# Altium PCB UP02513040.PcbDoc
Units mil, origin at the board's own origin, x right, y up, seen from the top; angles counter-clockwise.
Board outline 5400 x 2950 mil, 2 copper layers (Top Layer, Bottom Layer); 37 components, 18 nets, 84 pads, 0 vias.
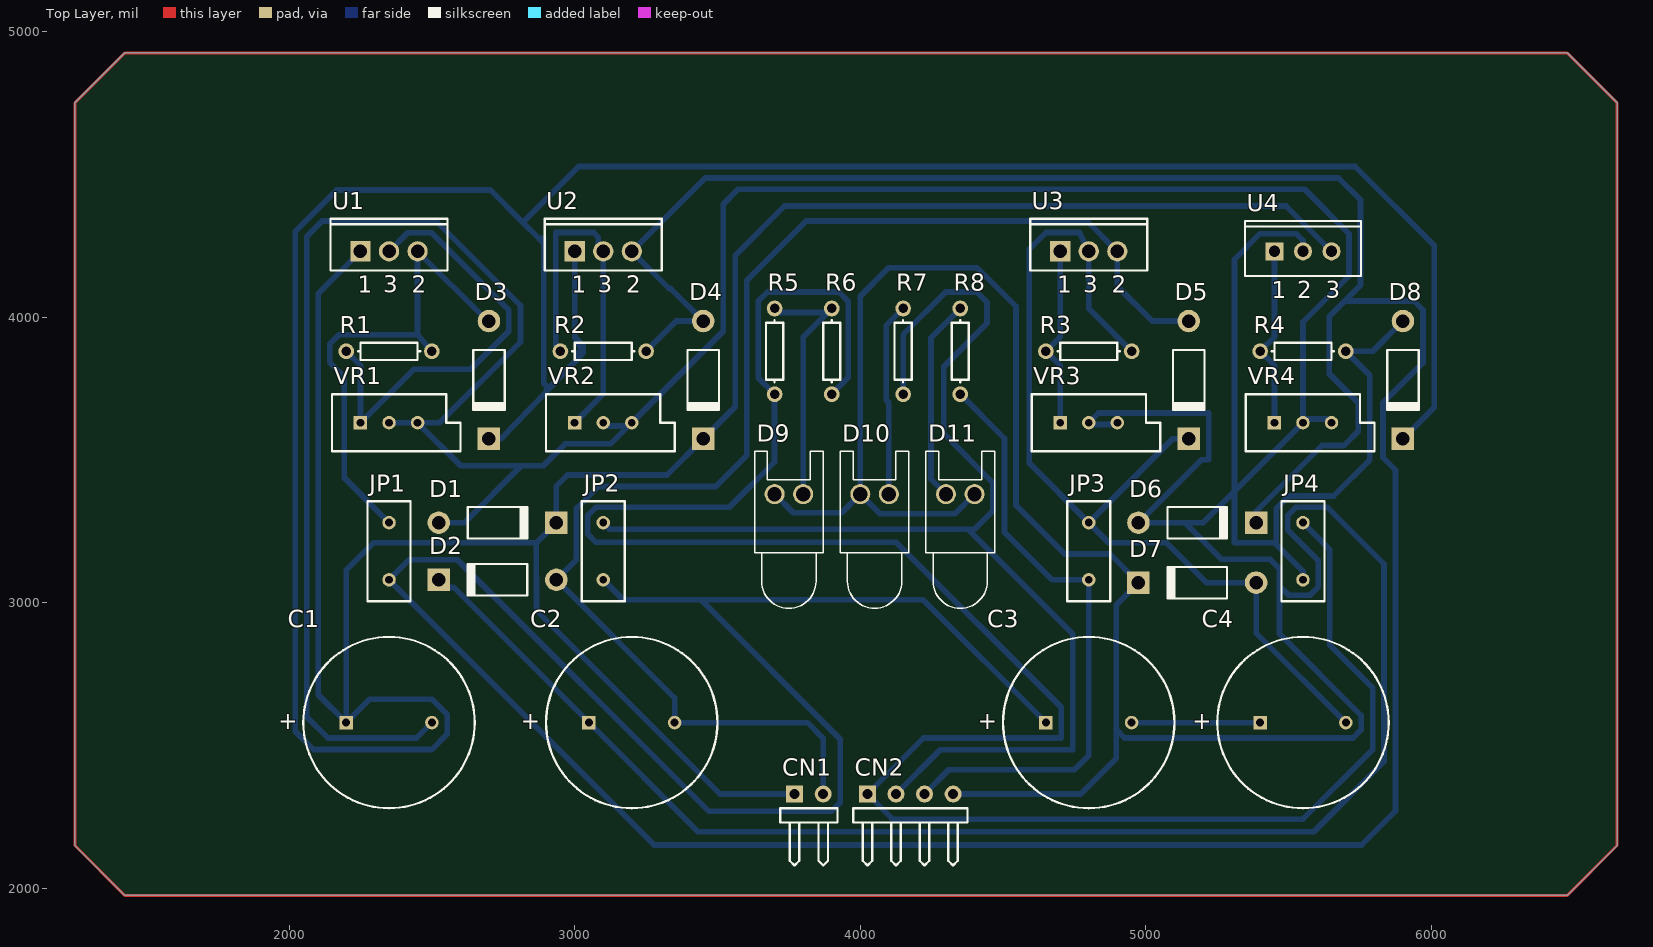
[diagram p0: Top Layer view]
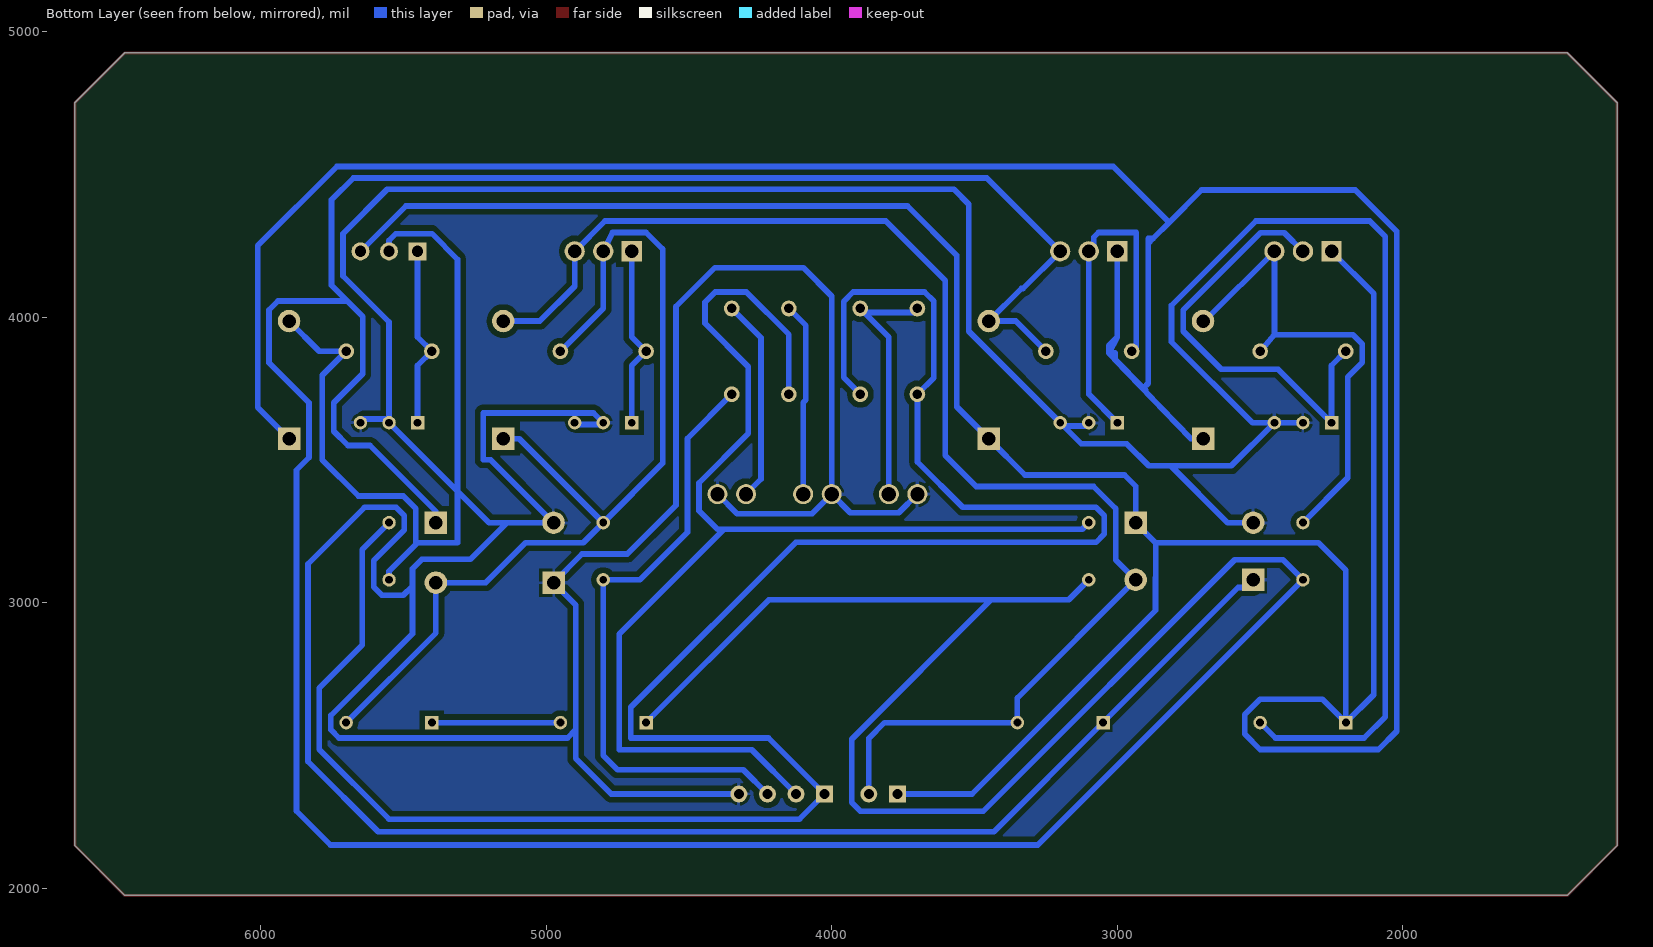
[diagram p1: Bottom Layer view, seen from below]

## Layer stack, top to bottom
Top Solder: solder mask 0.4, Solder Resist, Dk 3.5
Top Layer: signal copper 1.4
Dielectric 1: dielectric 12.6, FR-4, Dk 4.8
Bottom Layer: signal copper 1.4
Bottom Solder: solder mask 0.4, Solder Resist, Dk 3.5

## Board outline
1250,2150 1250,4750 1425,4925 6475,4925 6650,4750 6650,2150 6475,1975 1425,1975

## Design rules (kind name [scope] priority, off if disabled: settings)
Clearance [All] p1: gap=20 ignorepadtopadclearanceinfootprint=FALSE
PolygonConnect [All] p1: connectstyle=Relief reliefconductorwidth=10 reliefentries=4 polygonreliefangle="90 Angle" airgapwidth=10
RoutingLayers [All] p1: top layer_v5=FALSE bottom layer_v5=TRUE
RoutingVias [All] p1: holewidth=28 width=50 viastyle="Through Hole" minholewidth=28 minwidth=50 maxholewidth=28 maxwidth=50
SolderMaskExpansion [All] p1: expansion=4
Width [All] p1: maxlimit=40 minlimit=10 preferedwidth=20
29 further rules are at their usual default settings.

## Components (designator, comment, footprint, x,y, rotation, side; value= is the part's Value field where it differs from the comment)
C1 "Cap Pol1" RB7.6-15 2350,2580 r180 top value=0.1uF/10V
C2 "Cap Pol1" RB7.6-15 3200,2580 r180 top value=0.1uF/10V
C3 "Cap Pol1" RB7.6-15 4800,2580 r180 top value=1uF/10V
C4 "Cap Pol1" RB7.6-15 5550,2580 r180 top value=1uF/10V
CN1 "Header 2H" HDR1X2H 3770,2330 r0 top
CN2 "Header 4H" HDR1X4H 4025,2330 r0 top
D1 "1N4001" DO-41 2730,3280 r0 top
D2 "1N4001" DO-41 2730,3080 r180 top
D3 "1N4001" DO-41 2700,3780 r270 top
D4 "1N4001" DO-41 3450,3780 r270 top
D5 "1N4001" DO-41 5150,3780 r270 top
D6 "1N4001" DO-41 5180,3280 r0 top
D7 "1N4001" DO-41 5180,3070 r180 top
D8 "1N4001" DO-41 5900,3780 r270 top
D9 "+12V" LED-0 3750,3380 r0 top
D10 "+5V" LED-0 4050,3380 r0 top
D11 "-5V" LED-0 4350,3380 r0 top
JP1 "Jumper" RAD-0.2 2350,3180 r270 top
JP2 "Jumper" RAD-0.2 3100,3180 r90 top
JP3 "Jumper" RAD-0.2 4800,3180 r270 top
JP4 "Jumper" RAD-0.2 5550,3180 r90 top
R1 "Res1" AXIAL-0.3 2350,3880 r180 top value=240
R2 "Res1" AXIAL-0.3 3100,3880 r180 top value=240
R3 "Res1" AXIAL-0.3 4800,3880 r180 top value=240
R4 "Res1" AXIAL-0.3 5550,3880 r180 top value=240
R5 "Res1" AXIAL-0.3 3700,3880 r90 top value=1K
R6 "Res1" AXIAL-0.3 3900,3880 r90 top value=1K
R7 "Res1" AXIAL-0.3 4150,3880 r90 top value=150
R8 "Res1" AXIAL-0.3 4350,3880 r90 top value=150
U1 "L7805CP" ISOWATT220AB 2350,4230 r0 top
U2 "L7805CP" ISOWATT220AB 3100,4230 r0 top
U3 "L7905CP" ISOWATT220AB 4800,4230 r0 top
U4 "LM317T" 221A-04 5550,4230 r0 top
VR1 "RPot" VR5 2350,3630 r0 top value=1K
VR2 "RPot" VR5 3100,3630 r0 top value=1K
VR3 "RPot" VR5 4800,3630 r0 top value=1K
VR4 "RPot" VR5 5550,3630 r0 top value=1K

## Footprints (in the part's own frame and the unit in brackets; to place one, negate y for a bottom-side part, rotate by r counter-clockwise, add the part's x,y. Pads: shape width x height; smd on the part's side, far side on the other; paste and mask are expansions set on the pad)
221A-04 [mm] "TO, Thru-Hole, Vertical, Heatsink Mounted; 3 In-Line Leads; Pitch 2.54 mm"
  rect 1.6x1.6 hole 1: 1(-2.54,0)
  round 1.6 hole 1: 2(0,0) 3(2.54,0)
  silkscreen extent -5.15,-2.2 5.15,2.7
AXIAL-0.3 [mm] "Axial Device, Thru-Hole; 2 Leads; 0.3 in Pin Spacing"
  round 1.4 hole 0.85: 1(-3.81,0) 2(3.81,0)
  silkscreen extent -2.77,-0.76 2.77,0.76
DO-41 [mm] "Diode, Axial; Body 5.2 x 2.7 mm (LxDia. max), Lead Dia. 0.86 mm (max)"
  round 2 hole 1.2: 1(-5.23,0)
  rect 2x2 hole 1.2: 2(5.23,0)
  silkscreen extent -2.65,-1.4 2.75,1.4
HDR1X2H [mm] "Connector; Header; 2 Position; Right Angle"
  rect 1.5x1.5 hole 0.9: 1(0,0)
  round 1.5 hole 0.9: 2(2.54,0)
  silkscreen extent -1.27,-6.35 3.81,-1.27
HDR1X4H [mm] "Connector; Header; 4 Position; Right Angle"
  rect 1.5x1.5 hole 0.9: 1(0,0)
  round 1.5 hole 0.9: 2(2.54,0) 3(5.08,0) 4(7.62,0)
  silkscreen extent -1.27,-6.35 8.89,-1.27
ISOWATT220AB [mm] "TO, Thru-Hole, Vertical, Heatsink Mounted; 3 In-Line Leads; Pitch 2.54 mm; Pin sequence 1, 3, 2"
  rect 1.8x1.8 hole 1.2: 1(-2.54,0)
  round 1.8 hole 1.2: 2(2.54,0) 3(0,0)
  silkscreen extent -5.2,-1.7 5.2,2.9
LED-0 [mil] "LED; 2 Leads"
  round 70 hole 50: 1(50,0) 2(-50,0)
  silkscreen extent -120,-400 120,150
RAD-0.2 [mm] "Radial Cap, Thru-Hole; 2 Leads; 0.2 in Pin Spacing"
  round 1.2 hole 0.7: 1(-2.54,0) 2(2.54,0)
  silkscreen extent -4.44,-1.91 4.44,1.91
RB7.6-15 [mm] "Polarized Capacitor (Radial); 2 Leads"
  rect 1.2x1.2 hole 0.7: 1(3.81,0)
  round 1.2 hole 0.7: 2(-3.81,0)
  silkscreen extent -7.62,-7.62 7.62,7.62
VR5 [mm] "Thru-Hole; 3 Leads"
  rect 1.2x1.2 hole 0.7: 1(-2.54,0)
  round 1.2 hole 0.7: 2(0,0) 3(2.54,0)
  silkscreen extent -5.08,-2.54 6.35,2.54

## Part data
C1 C2 C3 C4: "Polarized Capacitor (Radial)", LatestRevisionDate=17-Jul-2002, LatestRevisionNote="Re-released for DXP Platform.", PackageDescription="Polarized Capacitor (Radial); 2 Leads", PackageReference=RB7.6-15, Published=8-Jun-2000, Publisher="Altium Limited"
CN1: "Header, 2-Pin, Right Angle", Manufacturer="PHOENIX CONTACT", Manufacturer Part Number=1725656, Rated Current=6, Rated Voltage=125, Supplier Part Number 1=2785623, Voltage Rating VAC=63, Block Orientation="Through Hole Right Angle", ComponentLink1Description=http://eshop.phoenixcontact.com/phoenix/treeViewClick.do?UID=1725656&parentUID=null&reloadFrame=true, ComponentLink1URL=http://eshop.phoenixcontact.com/phoenix/treeViewClick.do?UID=1725656&parentUID=null&reloadFrame=true, ComponentLink2Description=http://www.farnell.com/datasheets/2309717.pdf, ComponentLink2URL=http://www.farnell.com/datasheets/2309717.pdf, ComponentLink3Description=http://www.farnell.com/product360s/PHOENIXCONTACT-2WAY.php, ComponentLink3URL=http://www.farnell.com/product360s/PHOENIXCONTACT-2WAY.php, ComponentLink4Description=http://www.farnell.com/product360s/product360.php?productshortname=PHOENIXCONTACT-2WAY, ComponentLink4URL=http://www.farnell.com/product360s/product360.php?productshortname=PHOENIXCONTACT-2WAY, ComponentLink5Description=http://www.farnell.com/datasheets/1378966.pdf, ComponentLink5URL=http://www.farnell.com/datasheets/1378966.pdf, ComponentLink6Description=http://www.farnell.com/datasheets/2369305.pdf, ComponentLink6URL=http://www.farnell.com/datasheets/2369305.pdf, Conductor Area CSA=0.5, Connector Mounting="PCB Mount", Connector Type="Terminal Block, PCB", LatestRevisionDate=17-Jul-2002, LatestRevisionNote="Re-released for DXP Platform.", No. of Positions=2, Pitch Spacing=2.54, Pricing 1="1=7.29 (GBP)", Product Range=MPT, Publisher="Altium Limited", RoHS=YES, Stock 1=15, Supplier 1=Farnell, SVHC="No SVHC (15-Jun-2015)", Wire Area Size Max=0.5, Wire Area Size Min="0.14mm²<!--FANDB--><div class=\"features-and-benefits-container\"><div class=\"features-and-benefits-description\"><span class=\"features-benefits-value\">The 1725656 is a 2-way Wire-to-board PCB Terminal Block made of PA insulation that allows connection of two conductors. The MPT 0,5/ 2-2,54 has extremely small design for the respective conductor cross section. It features screw connection with tension sleeve and wave soldering.</span></div><div class=\"features-and-benefits-list\"><ul class=\"features-and-benefits-list-list\"><li class=\"features-and-benefits-list-item\">Green color</li><li class=\"features-and-benefits-list-item\">Well-known connection principle allows worldwide use</li><li class=\"features-and-benefits-list-item\">UL94V-0 Flammability rating</li><li class=\"features-and-benefits-list-item\">Low temperature rise, maximum contact force</li></ul></div><div class=\"features-and-benefits-applications\"><ul class=\"features-and-benefits-value\"><li class=\"features-and-benefits-list-item\">Industrial</li></ul></div></div>", Wire Connection Method=Screw, Wire Size AWG Max=20, Wire Size AWG Min=26
CN2: "Header, 4-Pin, Right Angle", Supplier Part Number 1=2785762, LatestRevisionDate=17-Jul-2002, LatestRevisionNote="Re-released for DXP Platform.", Publisher="Altium Limited", Supplier 1=Farnell
D1 D2 D3 D4 D5 D6 D7 D8: library part "Diode 1N4001", "1 Amp General Purpose Rectifier", Capacitance @ Vr, F=-, Current - Average Rectified (Io)=1A, Current - Reverse Leakage @ Vr="5µA @ 50V", Manufacturer="Micro Commercial Co", Manufacturer Part Number=1N4001-TP, Operating Temperature - Junction="-55°C ~ 150°C", Package / Case="DO-204AL, DO-41, Axial", Supplier Device Package=DO-41, Supplier Part Number 1=1N4001-TPMSTR-ND, Voltage - Forward (Vf) (Max) @ If="1.1V @ 1A", Category="Discrete Semiconductor Products", Code_JEDEC=DO-204-AL, ComponentLink1Description="Manufacturer Link", ComponentLink1URL=http://www.fairchildsemi.com/, ComponentLink2Description=Datasheet, ComponentLink2URL=http://www.fairchildsemi.com/ds/1N%2F1N4001.pdf, ComponentLink3Description=http://www.mccsemi.com/up_pdf/1N4001-1N4007(DO-41).pdf, ComponentLink3URL=http://www.mccsemi.com/up_pdf/1N4001-1N4007(DO-41).pdf, DatasheetVersion=1998, Diode Type=Standard, LatestRevisionDate=17-Jul-2002, LatestRevisionNote="Re-released for DXP Platform.", Mounting Type="Through Hole", PackageDescription="Diode, Axial; Body 5.2 x 2.7 mm (LxDia. max), Lead Dia. 0.86 mm (max)", PackageReference=DO-41, PackageVersion=Aug-1999, Packaging="Tape & Reel (TR)", Part Status=Active, Pricing 1="5000=0.01415, 10000=0.0123, 25000=0.01107, 50000=0.00984, 125000=0.0082 (EUR)", Published=8-Jun-2000, Publisher="Altium Limited", RoHS="RoHS Compliant", Speed="Standard Recovery >500ns, > 200mA (Io)", Stock 1=80000, Supplier 1=Digi-Key
D9 D10 D11: library part LED0, "Typical INFRARED GaAs LED", Manufacturer=MULTICOMP, Manufacturer Part Number=OVL-3324, Supplier Part Number 1=15R2196, ComponentLink1Description=http://www.farnell.com/datasheets/1661953.pdf, ComponentLink1URL=http://www.farnell.com/datasheets/1661953.pdf, LatestRevisionDate=08-Jul-2005, LatestRevisionNote="Mech Layer 1 removed.", PackageDescription="LED; 2 Leads", PackageReference=LED-0, Pricing 1="1=0.576, 10=0.432, 100=0.287, 200=0.222, 500=0.18, 1000=0.14, 2000=0.13, 5000=0.123 (USD)", Published=8-Jun-2000, Publisher="Altium Limited", RoHS=YES, Stock 1=1580, Supplier 1=Newark
JP1 JP2 JP3 JP4: "Jumper Wire", Colour=Black, Contact Resistance=20, Current Rating=3, Flammability Rating=UL94V-0, Insulation Resistance=1000, Manufacturer=MULTICOMP, Manufacturer Part Number=2211S-02G, Operating Temperature Max=105, Operating Temperature Min=-40, Supplier Part Number 1=1593411, Voltage Rating VAC=250, Withstand Voltage="600V<!--FANDB--><div class=\"features-and-benefits-container\"><div class=\"features-and-benefits-description\"><span class=\"features-benefits-value\">The 2211S series from Multicomp are 2.54mm pitch, single row PCB headers.</span></div><div class=\"features-and-benefits-list\"><ul class=\"features-and-benefits-list-list\"><li class=\"features-and-benefits-list-item\">Vertical mounting</li><li class=\"features-and-benefits-list-item\">Current rating of 3A</li><li class=\"features-and-benefits-list-item\">Voltage rating of 250VAC/DC</li><li class=\"features-and-benefits-list-item\">Operating temperature range -40°C to 105°C</li><li class=\"features-and-benefits-list-item\">Contact material is copper alloy</li><li class=\"features-and-benefits-list-item\">Gold plated contacts</li><li class=\"features-and-benefits-list-item\">Number of contacts varies from 2 to 24 pins</li><li class=\"features-and-benefits-list-item\">Maximum contact resistance of 20mohm</li><li class=\"features-and-benefits-list-item\">Minimum insulation resistance of 1000", ComponentLink1Description=http://www.farnell.com/datasheets/1518407.pdf, ComponentLink1URL=http://www.farnell.com/datasheets/1518407.pdf, Contact Material="Copper Alloy", Contact Plating="Gold Plated Contacts", Contact Termination=Solder, Contact Termination Type="Through Hole", Gender=Header, LatestRevisionDate=17-Jul-2002, LatestRevisionNote="Re-released for DXP Platform.", Lead Spacing=2.54, No. of Contacts=2, No. of Rows=1, PackageDescription="Radial Cap, Thru-Hole; 2 Leads; 0.2 in Pin Spacing", PackageReference=RAD-0.2, Pitch Spacing=2.54, Pricing 1="1=0.0204, 500=0.018, 1500=0.0153, 2500=0.0133, 5000=0.0102, 10000=0.0068 (GBP)", Product Range=2211, Published=24-Mar-1999, Publisher="Altium Limited", RoHS=YES, Stock 1=245370, Supplier 1=Farnell, Termination Method=Solder
R1 R2 R3 R4: "Resistor", Manufacturer="NTE Electronics, Inc.", Manufacturer Part Number=EW124, Supplier Part Number 1=70723335, ComponentLink1Description=https://www.alliedelec.com/m/d/9b79b2702712920db6f5ed7725f174c1.pdf, ComponentLink1URL=https://www.alliedelec.com/m/d/9b79b2702712920db6f5ed7725f174c1.pdf, ComponentLink2Description=https://www.alliedelec.com/nte-electronics-inc-ew124/70723335/, ComponentLink2URL=https://www.alliedelec.com/nte-electronics-inc-ew124/70723335/, LatestRevisionDate=17-Jul-2002, LatestRevisionNote="Re-released for DXP Platform.", PackageDescription="Axial Device, Thru-Hole; 2 Leads; 0.3 in Pin Spacing", PackageReference=AXIAL-0.3, Pricing 1="1=0.0900 (USD)", Published=8-Jun-2000, Publisher="Altium Limited", RoHS=No, Stock 1=0, Supplier 1=Allied
R5 R6: "Resistor", Manufacturer="NTE Electronics, Inc.", Manufacturer Part Number=EW124, Supplier Part Number 1=70723350, ComponentLink1Description=https://www.alliedelec.com/m/d/9b79b2702712920db6f5ed7725f174c1.pdf, ComponentLink1URL=https://www.alliedelec.com/m/d/9b79b2702712920db6f5ed7725f174c1.pdf, ComponentLink2Description=https://www.alliedelec.com/nte-electronics-inc-ew124/70723335/, ComponentLink2URL=https://www.alliedelec.com/nte-electronics-inc-ew124/70723335/, LatestRevisionDate=17-Jul-2002, LatestRevisionNote="Re-released for DXP Platform.", PackageDescription="Axial Device, Thru-Hole; 2 Leads; 0.3 in Pin Spacing", PackageReference=AXIAL-0.3, Published=8-Jun-2000, Publisher="Altium Limited", RoHS=No, Supplier 1=Allied
R7 R8: "Resistor", Manufacturer="NTE Electronics, Inc.", Manufacturer Part Number=EW124, Supplier Part Number 1=70723330, ComponentLink1Description=https://www.alliedelec.com/m/d/9b79b2702712920db6f5ed7725f174c1.pdf, ComponentLink1URL=https://www.alliedelec.com/m/d/9b79b2702712920db6f5ed7725f174c1.pdf, ComponentLink2Description=https://www.alliedelec.com/nte-electronics-inc-ew124/70723335/, ComponentLink2URL=https://www.alliedelec.com/nte-electronics-inc-ew124/70723335/, LatestRevisionDate=17-Jul-2002, LatestRevisionNote="Re-released for DXP Platform.", PackageDescription="Axial Device, Thru-Hole; 2 Leads; 0.3 in Pin Spacing", PackageReference=AXIAL-0.3, Published=8-Jun-2000, Publisher="Altium Limited", RoHS=No, Supplier 1=Allied
U1 U2: "Positive Voltage Regulator", Case/Package=TO-220-3, Dropout Voltage=2V, Manufacturer=STMicroelectronics, Max Input Voltage=35V, Max Operating Temperature=125°C, Max Output Current=1.5A, Min Input Voltage=7V, Min Operating Temperature=0°C, Min Output Voltage=4.65V, Nominal Output Voltage=5V, Package Quantity=50, Power Supply Rejection Ratio (PSRR)=62dB, Quiescent Current=8mA, Supplier Part Number 1=296756, Tolerance=5%, ComponentLink1Description="Manufacturer Link", ComponentLink1URL=http://www.st.com/, ComponentLink2Description=https://datasheet.ciiva.com/14149/l78xx-c-ab-ac-eng-tds-14149769.pdf, ComponentLink2URL=https://datasheet.ciiva.com/14149/l78xx-c-ab-ac-eng-tds-14149769.pdf, ComponentLink3Description=https://datasheet.ciiva.com/3224/cd00000444-3224937.pdf, ComponentLink3URL=https://datasheet.ciiva.com/3224/cd00000444-3224937.pdf, ComponentLink4Description=https://datasheet.ciiva.com/2044/cd00000444-2044511.pdf, ComponentLink4URL=https://datasheet.ciiva.com/2044/cd00000444-2044511.pdf, ComponentLink5Description=https://datasheet.ciiva.com/16382/cd00000444-16382022.pdf, ComponentLink5URL=https://datasheet.ciiva.com/16382/cd00000444-16382022.pdf, ComponentLink6Description=https://datasheet.ciiva.com/1511/1805459-1511911.pdf, ComponentLink6URL=https://datasheet.ciiva.com/1511/1805459-1511911.pdf, ComponentLink7Description=https://datasheet.ciiva.com/1511/1805459-1511912.pdf, ComponentLink7URL=https://datasheet.ciiva.com/1511/1805459-1511912.pdf, DatasheetVersion=Dec-1998, Height=9.3mm, LatestRevisionDate=17-Jul-2002, LatestRevisionNote="Re-released for DXP Platform.", Lead Free="Lead Free", Length=10.4mm, Manufacturer Part Number=L7805CP, Mount="Through Hole", Note="Tab is connected to pin 3 (GND).", Number of Outputs=1, Number of Pins=3, Number of Regulators=1, Output Current=1.5A, Output Voltage=5V, PackageDescription="TO, Thru-Hole, Vertical, Heatsink Mounted; 3 In-Line Leads; Pitch 2.54 mm; Pin sequence 1, 3, 2", PackageReference=ISOWATT220AB, PackageVersion=Jul-1998, Packaging=Rail/Tube, Polarity=Positive, Pricing 1="1=0.64, 10=0.55, 50=0.45, 100=0.36, 250=0.33 (EUR)", Published=24-Aug-2001, Publisher="Altium Limited", Radiation Hardening=No, REACH SVHC="No SVHC", Stock 1=1072, Supplier 1=RSComponents, Weight=0.08113oz, Width=4.6mm
U3: "Negative Voltage Regulator", Current - Output=1.5A, Manufacturer=STMicroelectronics, Operating Temperature="0°C ~ 125°C", Package / Case="TO-220-3 Full Pack", Supplier Device Package=TO-220FP, Supplier Part Number 1=497-7293-5-ND, Voltage - Input (Max)=-35V, Voltage - Output (Max)=-, Voltage - Output (Min/Fixed)=-5V, Voltage Dropout (Max)="1.4V @ 1A (Typ)", Category="Integrated Circuits (ICs)", ComponentLink1Description="Manufacturer Link", ComponentLink1URL=http://www.st.com/, ComponentLink2Description=Datasheet, ComponentLink2URL=http://www.st.com/stonline/products/literature/ds/2149/l7905c.pdf, ComponentLink3Description=http://media.digikey.com/pdf/Data%20Sheets/ST%20Microelectronics%20PDFS/L79xxC_Rev21_May2012.pdf, ComponentLink3URL=http://media.digikey.com/pdf/Data%20Sheets/ST%20Microelectronics%20PDFS/L79xxC_Rev21_May2012.pdf, Control Features=-, DatasheetVersion=Apr-1997, LatestRevisionDate=17-Jul-2002, LatestRevisionNote="Re-released for DXP Platform.", Manufacturer Part Number=L7905CP, Mounting Type="Through Hole", Note="Tab is connected to pin 3 (IN).", Output Configuration=Negative, Output Type=Fixed, PackageDescription="TO, Thru-Hole, Vertical, Heatsink Mounted; 3 In-Line Leads; Pitch 2.54 mm; Pin sequence 1, 3, 2", PackageReference=ISOWATT220AB, PackageVersion=Jul-1998, Packaging=Tube, Part Status=Active, Pricing 1="1=0.72, 10=0.642, 100=0.5005, 500=0.41348, 1000=0.32643 (EUR)", Protection Features="Over Temperature, Short Circuit", PSRR="60dB (120Hz)", Published=24-Aug-2001, Publisher="Altium Limited", RoHS="RoHS Compliant", Stock 1=3343, Supplier 1=Digi-Key
U4: "3-Terminal Adjustable Positive Voltage Regulator", Supplier Part Number 1=1652293, Code_JEDEC=TO-262-AA, ComponentLink1Description="Manufacturer Link", ComponentLink1URL=http://www.onsemi.com/site/products/taxonomy/0,4438,503,00.html, ComponentLink2Description=Datasheet, ComponentLink2URL=http://www.onsemi.com/pub/Collateral/LM317-D.PDF, DatasheetVersion=1988, Note="Heatsink surface connected to pin 2.", PackageDescription="TO, Thru-Hole, Vertical, Heatsink Mounted; 3 In-Line Leads; Pitch 2.54 mm", PackageReference=221A-04, Published=17-Jul-2002, Publisher="Altium Limited", Supplier 1=Farnell
VR1 VR2 VR3 VR4: "Potentiometer", Manufacturer=BOURNS, Manufacturer Part Number=3266W-1-103LF, Power Rating=250, Resistance Tolerance="± 10%", Supplier Part Number 1=9352651, Temperature Coefficient="± 100", Track Resistance=10, Automotive Qualification Standard=-, ComponentLink1Description=http://www.bourns.com/engineering/3266/3266W.stp, ComponentLink1URL=http://www.bourns.com/engineering/3266/3266W.stp, ComponentLink2Description=http://www.farnell.com/datasheets/2061259.pdf, ComponentLink2URL=http://www.farnell.com/datasheets/2061259.pdf, ComponentLink3Description=http://www.farnell.com/cad/1563549.stp, ComponentLink3URL=http://www.farnell.com/cad/1563549.stp, LatestRevisionDate=17-Jul-2002, LatestRevisionNote="Re-released for DXP Platform.", MSL=-, No. of Turns=12, PackageDescription="Variable Resistor, Thru-Hole; 3 Leads", PackageReference=VR5, Potentiometer Mounting="Through Hole", Pricing 1="1=3.16, 5=2.81, 10=2.46, 25=2.25, 50=1.97, 200=1.58, 1000=1.43, 2000=1.34 (GBP)", Product Range="Trimpot 3266 Series", Published=8-Jun-2000, Publisher="Altium Limited", RoHS=YES, Set Position=0.5, Sim Note="Enter the Resistance value and the set point into parameter fields.", Stock 1=4555, Supplier 1=Farnell, SVHC="No SVHC (20-Jun-2016)<!--FANDB--><div class=\"features-and-benefits-container\"><div class=\"features-and-benefits-description\"><span class=\"features-benefits-value\">The Trimpot 3266 series from Bourns are cermet, through hole trimming potentiometers. These potentiometers are multiturn which performs a variety of circuit adjustments in all types of electronic equipment. Typical applications are measuring linear distance, angle or rotation in production equipments.</span></div><div class=\"features-and-benefits-list\"><ul class=\"features-and-benefits-list-list\"><li class=\"features-and-benefits-list-item\">1/4inch square potentiometer</li><li class=\"features-and-benefits-list-item\">Side or top adjustment with lead screw</li><li class=\"features-and-benefits-list-item\">Sealing is IP65 rated</li><li class=\"features-and-benefits-list-item\">12 turns and rotational life of 200 cycles</li><li class=\"features-and-benefits-list-item\">Resistance value ranges from 10 ohm to 1Mohm</li><li class=\"features-and-benefits-list-item\">±10% tolerance</li><li class=\"features-and-benefits-list-item\">Temperature coefficient is ±100ppm/°C</li><li class=\"features-and-benefits-list-item\">Operating temperature ranges from -55°C to +125°C</li><li class=\"features-and-benefits-list-item\">Power rating is 0.25"

## Nets (pads, with @x,y where several pads share a name; then routed paths per layer and width w, separated by ;. In a path a pad name is that pad's centre, name@x,y a point inside that pad or via, vN(x,y) a via of type N, cw(c..) or ccw(c..) an arc to the next point about the centre after c; other vN are vias at no path point)
GND: C1.2 C2.1 CN2.4 D1.1 D2.2 D6.1 D7.2 D9.2 D10.2 D11.1 VR1.2 VR1.3 VR2.2 VR2.3 VR3.2 VR3.3 VR4.2 VR4.3 | length 22873.1
  Bottom Layer w20: VR1.2 VR1.3 ; C1.2 2446,2526 2136,2526 2062,2600 2062,4282 2116,4336 2514.94,4336 2810,4040.94 2810,3913 2527,3630 VR1.3 ; D2.2 2524.09,3053 2577,3053 C2.1 3432,2198 5588,2198 5834,2444 5834,3135.29 5635.66,3333.62 5525,3333.62 5496.38,3305 5496.38,3254.69 5603.62,3147.45 5603.62,3054.62 5575,3026 5500,3026 5468,3058 ; D1.1 2614,3280 2813,3479 ; VR2.2 3111.39,3618.61 VR2.3@3188.61,3618.61 ; D9.2 3765,3315 3935,3315 D10.2 ; CN2.4 4772,2330 4896,2454 4896,2555.38 ; D11.1 4331.5,3311.5 4068.5,3311.5 D10.2 ; VR3.3 4894,3624 4806,3624 VR3.2 4834,3664 5220,3664 5220,3500 5194.09,3500 D6.1 5137,3280 ; VR4.3 5637,3643 5563,3643 VR4.2 ; VR1.3 2601,3479 2813,3479 ; 2813,3479 2890,3479 2967,3556 3126,3556 VR2.3@3188.61,3618.61 ; VR2.3@3188.61,3618.61 VR2.3 3520,3950 3520,4395.11 3572,4447.11 5555.89,4447.11 5711.5,4291.5 5711.5,4144 5550,3982.5 VR4.2 ; D10.2 4000,4073 4100,4173 4409,4173 4545,4037 4545,3341 4716,3170 4874.09,3170 D7.2 4896,2991.91 4896,2555.38 ; 4896,2555.38 4925,2526.38 5725,2526.38 5753.62,2555 5753.62,2605.38 5468,2891 5468,3058 ; 5137,3280 5200,3280 VR4.2 ; 5137,3280 5265,3152 5435,3152 5468,3119 5468,3058
NetC1_1: C1.1 CN1.1 D1.2 D3.2 D4.2 D8.2 U1.1 U2.1 U4.3 | length 17681.6
  Bottom Layer w20: U1.1 2102.44,4082.44 2102.44,2677.56 C1.1 ; D3.2 2743,3574.09 3008,3850 3008,3852 ; 2900,3744 2908,3752 ; U2.1 3000,3930 ; CN1.1 3509,2330 2866,2973 2865.91,3210 ; U4.3 5491,4389 3735,4389 3562,4216 3562,3686.09 D4.2 3322.91,3447 2975,3447 2935.91,3407.91 D1.2 2865.91,3210 ; D8.2 6010,3684.09 6010,4249.78 5732.67,4527.11 3014.11,4527.11 2818.5,4331.5 ; C1.1 2282,2662 2500,2662 2554,2608 2554,2540 2500,2486 2086,2486 2022,2550 2022,4300 2167,4445 2705,4445 2818.5,4331.5 ; C1.1 2200,3114 2296,3210 2865.91,3210 ; 2818.5,4331.5 2875,4275 ; 2875,4275 2892,4258 ; 2875,4275 2892,4275 2892,4258 ; 2892,4258 2892,3768 2908,3752 ; 2908,3752 3008,3852 ; 3000,3930 3030,3900 3030,3874 ; 3000,3930 3030,3874 ; 3008,3852 3008,3874 3030,3874 ; 3008,3852 3030,3874
NetC2_2: C2.2 CN1.2 D2.1 D5.1 U3.2 | length 4824.1
  Bottom Layer w20: CN1.2 3870,2525 3815,2580 C2.2 3350,2665.91 D2.1 3006,3150.09 3006,3330 3083,3407 3494,3407 3602.44,3515.44 3602.44,4127.56 3810.88,4336 4794,4336 U3.2 4900,4108 5022.09,3985.91 D5.1
NetC3_1: C3.1 D4.1 D6.2 JP1.2 JP2.1 R2.1 U2.2 | length 15426.7
  Bottom Layer w20: JP2.1 3170,3010 3442,3010 ; R2.1 3355.91,3985.91 D4.1 3335.91,4100 3330,4100 U2.2 3457.11,4487.11 5674.76,4487.11 5751.5,4410.37 5751.5,4111.52 5695.98,4056 ; C3.1 4220,3010 3442,3010 ; D6.2 5385.91,3319.53 5616.38,3550 5693.62,3550 5743.62,3600 5743.62,3700 5642,3801.62 5642,4002.02 5695.98,4056 ; 3442,3010 3930,2522 3930,2300 3900,2270 3469,2270 2589,3150 2420,3150 JP1.2 3278.5,2151.5 5755.2,2151.5 5874,2270.3 5874,3464 5830,3508 5830,3700 5970,3840 5970,4025 5939,4056 5695.98,4056
NetC3_2: C3.2 C4.1 | length 450
  Bottom Layer w20: C3.2 C4.1
NetC4_2: C4.2 D5.2 D7.1 JP3.1 R3.1 U3.3 | length 3494.1
  Bottom Layer w20: R3.1 4800,4030 U3.3 4767.32,4296 4650,4296 4592,4238 4592,3488 JP3.1 ; D5.2 5094.09,3574.09 JP3.1 ; C4.2 5385.91,2894.09 D7.1 5211.72,3070 5071.72,3210 4870,3210 JP3.1
NetCN2_1: CN2.1 JP4.2 R5.1 R6.1 | length 7651.9
  Bottom Layer w20: R6.1 3958,3788 3958,4054.56 3925,4087.56 3675,4087.56 3642.44,4055 3642.44,3787.56 R5.1 3700,3492.46 3541.54,3334 3075,3334 3046,3305 3046,3240 3075,3211 4126.24,3211 4703.62,2633.62 4703.62,2526.38 4221.38,2526.38 CN2.1 4113,2242 5550,2242 5794,2486 5794,2701 5643.62,2851.38 5643.62,3186.38 JP4.2
NetCN2_2: CN2.2 JP2.2 R7.1 | length 4452.9
  Bottom Layer w20: JP2.2 3123,3257 4377,3257 ; CN2.2 4280,2485 4744,2485 4744,2890 4377,3257 ; R7.1 4150,3939 4299,4088 4408,4088 4444,4052 4444,3978.17 4292,3826.17 4292,3592 4465,3419 4465,3322 4400,3257 4377,3257
NetCN2_3: CN2.3 JP3.2 R8.1 | length 2157.6
  Bottom Layer w20: CN2.3 4310,2415 4750,2415 4800,2465 JP3.2 4671.5,3080 4505,3246.5 4505,3575 R8.1
NetD3_1: D3.1 JP1.1 R1.1 U1.2 | length 1755.1
  Bottom Layer w20: JP1.1 2193,3437 2193,3790 2142.44,3840.56 2142.44,3905.44 2175,3938 2450,3938 ; R1.1 2450,3938 ; D3.1 2700,3990.91 2689.09,3990.91 U1.2 2450,3938
NetD8_1: D8.1 JP4.1 R4.1 U4.2 | length 2811.2
  Bottom Layer w20: JP4.1 5550,3110 5456.38,3203.62 ; U4.2 5550,4268 5526,4292 5400,4292 5310,4202 5310,3210 5450,3210 5456.38,3203.62 ; D8.1 5794.09,3880 R4.1 5783.62,3796.38 5783.62,3500 5657.24,3373.62 5500,3373.62 5456.38,3330 5456.38,3203.62
NetD9_1: D9.1 R5.2 R6.2 | length 883.4
  Bottom Layer w20: R5.2 3713.74,4016.26 R6.2@3886.26,4016.26 ; D9.1 3800,3930 R6.2@3886.26,4016.26 ; R6.2 R6.2@3886.26,4016.26
NetD10_1: D10.1 R7.2 | length 678.6
  Bottom Layer w20: D10.1 4100,3701 4090.42,3710.58 4090.42,3970.42 R7.2
NetD11_2: D11.2 R8.2 | length 714.2
  Bottom Layer w20: D11.2 4247.56,3432.44 4247.56,3927.56 R8.2
NetR1_2: R1.2 U1.3 VR1.1 | length 1556.1
  Bottom Layer w20: R1.2 2250,3830 VR1.1 2437,3817 2636.37,3817 2769.37,3950 2769.37,4025 2498.94,4295.43 2415.43,4295.43 U1.3
NetR2_2: R2.2 U2.3 VR2.1 | length 1276.1
  Bottom Layer w20: R2.2 2934,3896 2934,4296 3066,4296 3083,4279 3083,4247 U2.3 3100,3730 VR2.1
NetR3_2: R3.2 U3.1 VR3.1 | length 641.4
  Bottom Layer w20: VR3.1 4700,3830 R3.2 4700,3930 U3.1
NetR4_2: R4.2 U4.1 VR4.1 | length 641.4
  Bottom Layer w20: VR4.1 5450,3830 R4.2 5450,3930 U4.1
copper on no net: | length 16289.9
  Top Layer w10: 1250,2150 1425,1975 6475,1975 6650,2150 6650,4750 6475,4925 1425,4925 1250,4750 1250,2150

## Polygon pours and split planes (outlines as drawn)
GND on Bottom Layer "Bottom Layer-No Net" (solid, remove dead copper, pour order 16): 1420,4925 1420,4920 1250,4750 1250,2150 1425,1975 6475,1975 6650,2150 6650,4750 6475,4925

## Silkscreen, mask and mechanical layers (free items; w line width, h text height)
Top Overlay:
  lines w10: 4095,-8545 4095,-8155 ; 4295,-8545 4295,-8151.3 ; 4495,-8545 4495,-8151.3 ; 4695,-8545 4695,-8151.3 ; 4900,-8995 4900,-8605 ; 4995,-8545 4995,-8151.3 ; 5100,-8995 5100,-8601.3 ; 5220,-8543.7 5220,-8150 ; 5300,-8995 5300,-8601.3 ; 5420,-8543.7 5420,-8150 ; 5500,-8995 5500,-8601.3 ; 5745,-8543.7 5745,-8150 ; 5800,-8995 5800,-8601.3 ; 5945,-8543.7 5945,-8150 ; 6025,-8993.7 6025,-8600 ; 6145,-8545 6145,-8151.3 ; 6225,-8993.7 6225,-8600 ; 6345,-8543.7 6345,-8150 ; 6550,-8993.7 6550,-8600 ; 6750,-8993.7 6750,-8600 ; 6950,-8995 6950,-8601.3 ; 7150,-8993.7 7150,-8600
  lines w15: 4095,-8545 6345,-8545 ; 4900,-8995 7150,-8995
Mechanical 1:
  lines w10: 1600,4355 1600,4745 ; 1800,4355 1800,4748.7 ; 2000,4355 2000,4748.7 ; 2200,4355 2200,4748.7 ; 2500,4355 2500,4748.7 ; 2725,4356.3 2725,4750 ; 2925,4356.3 2925,4750 ; 3250,4356.3 3250,4750 ; 3450,4356.3 3450,4750 ; 3650,4355 3650,4748.7 ; 3850,4356.3 3850,4750 ; 4050,4355 4050,4745 ; 4250,4355 4250,4748.7 ; 4450,4355 4450,4748.7 ; 4650,4355 4650,4748.7 ; 4950,4355 4950,4748.7 ; 5175,4356.3 5175,4750 ; 5375,4356.3 5375,4750 ; 5700,4356.3 5700,4750 ; 5900,4356.3 5900,4750 ; 6100,4355 6100,4748.7 ; 6300,4356.3 6300,4750
  lines w15: 1600,4355 3850,4355 ; 4050,4355 6300,4355

## Text inside footprints (layer, text, board x,y; h text height)
C1: Top Overlay "+" at 2029.85,2609.01 h59.06 r180
C2: Top Overlay "+" at 2879.85,2609.01 h59.06 r180
C3: Top Overlay "+" at 4479.85,2609.01 h59.06 r180
C4: Top Overlay "+" at 5229.85,2609.01 h59.06 r180
U1: Top Overlay "1" at 2240.16,4085.32 h59.06; Top Overlay "2" at 2430.32,4085.32 h59.06; Top Overlay "3" at 2330.31,4085.31 h59.06
U2: Top Overlay "1" at 2990.16,4085.32 h59.06; Top Overlay "2" at 3180.32,4085.32 h59.06; Top Overlay "3" at 3080.31,4085.31 h59.06
U3: Top Overlay "1" at 4690.16,4085.32 h59.06; Top Overlay "2" at 4880.31,4085.32 h59.06; Top Overlay "3" at 4780.31,4085.31 h59.06
U4: Top Overlay "1" at 5440.16,4065.63 h59.06; Top Overlay "2" at 5530.31,4065.63 h59.06; Top Overlay "3" at 5630.31,4065.63 h59.06